# Altium PCB ver3.PcbDoc
Units mil, origin at the board's own origin, x right, y up, seen from the top; angles counter-clockwise.
Board outline 4925 x 3985 mil, 2 copper layers (Top Layer, Bottom Layer); 57 components, 113 nets, 266 pads, 26 vias.
Unrouted connection lines stored in the file: 7.
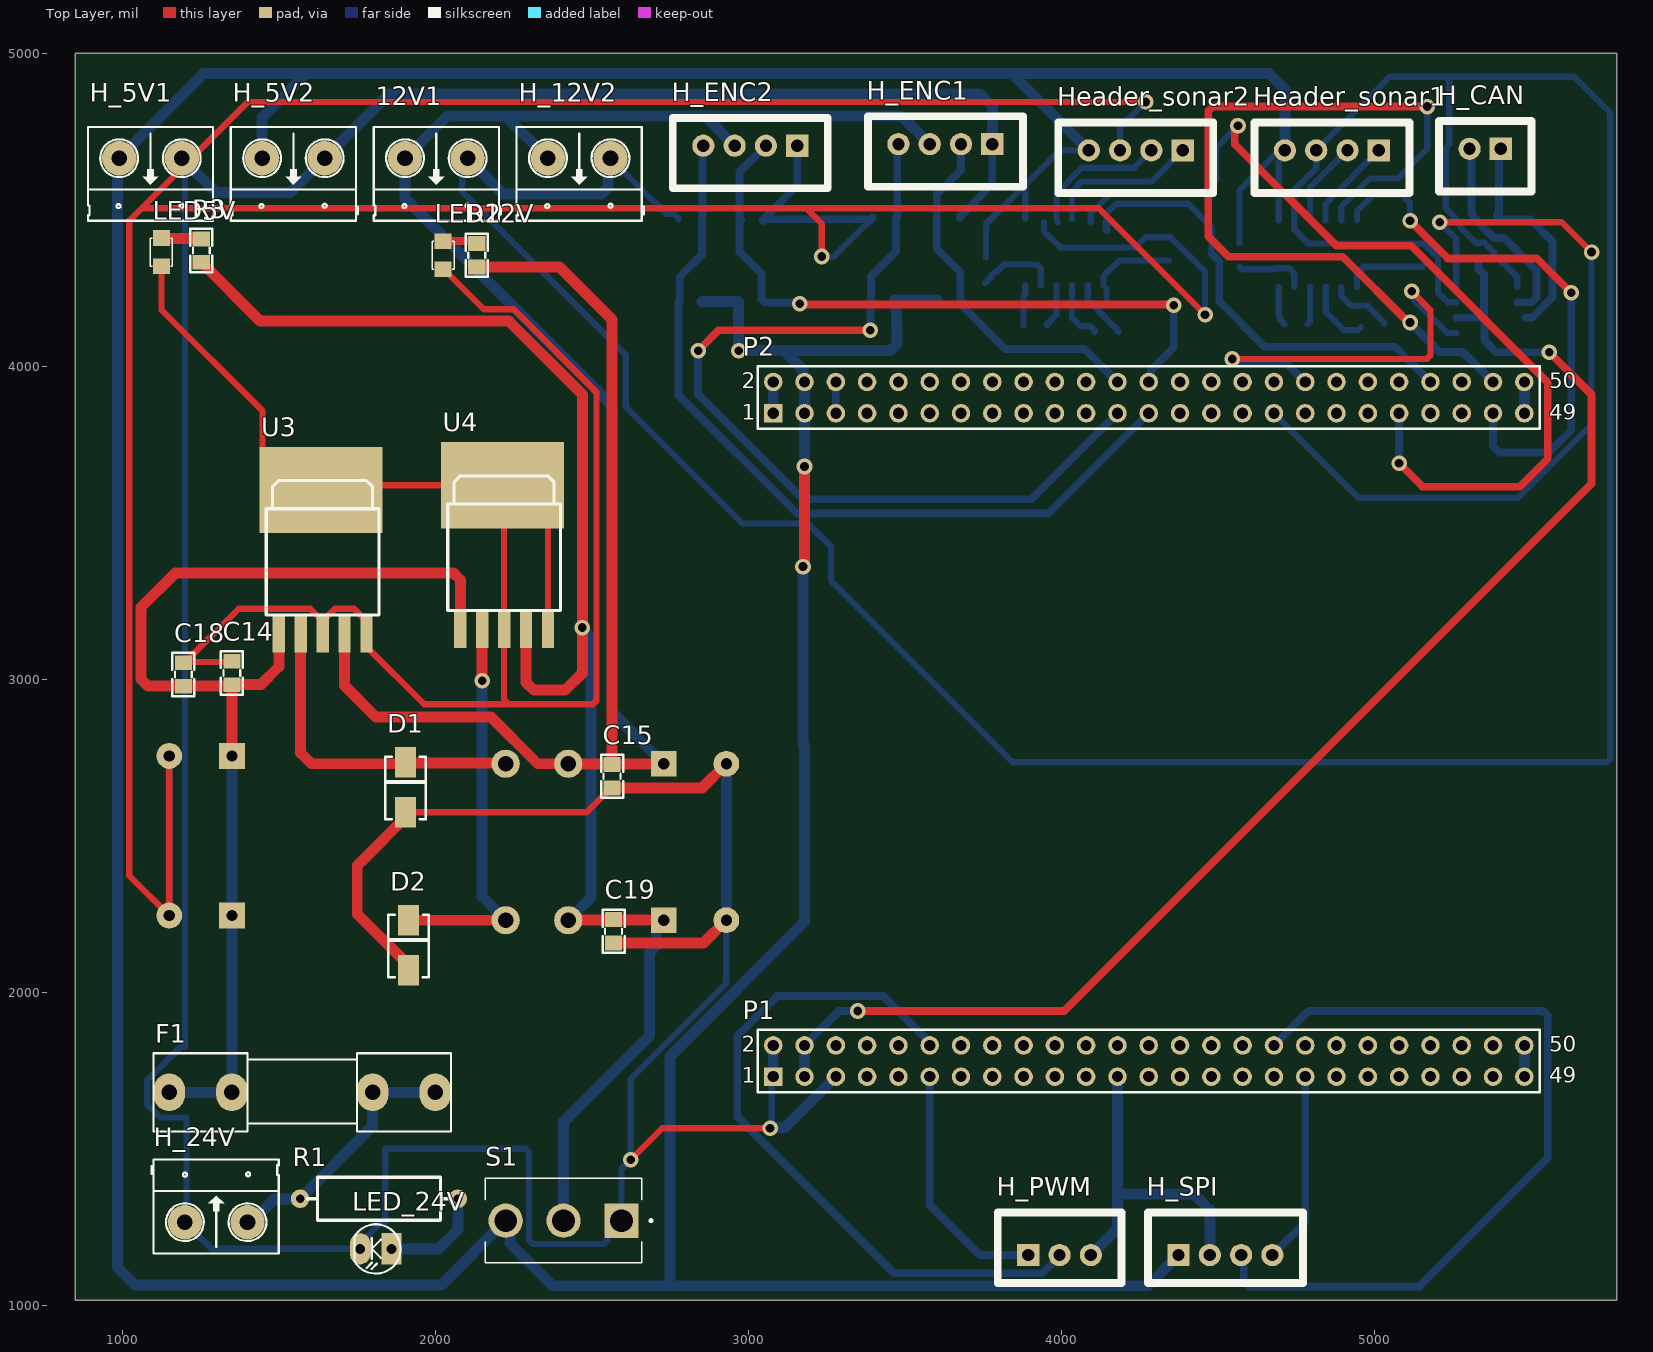
[diagram p0: Top Layer view]
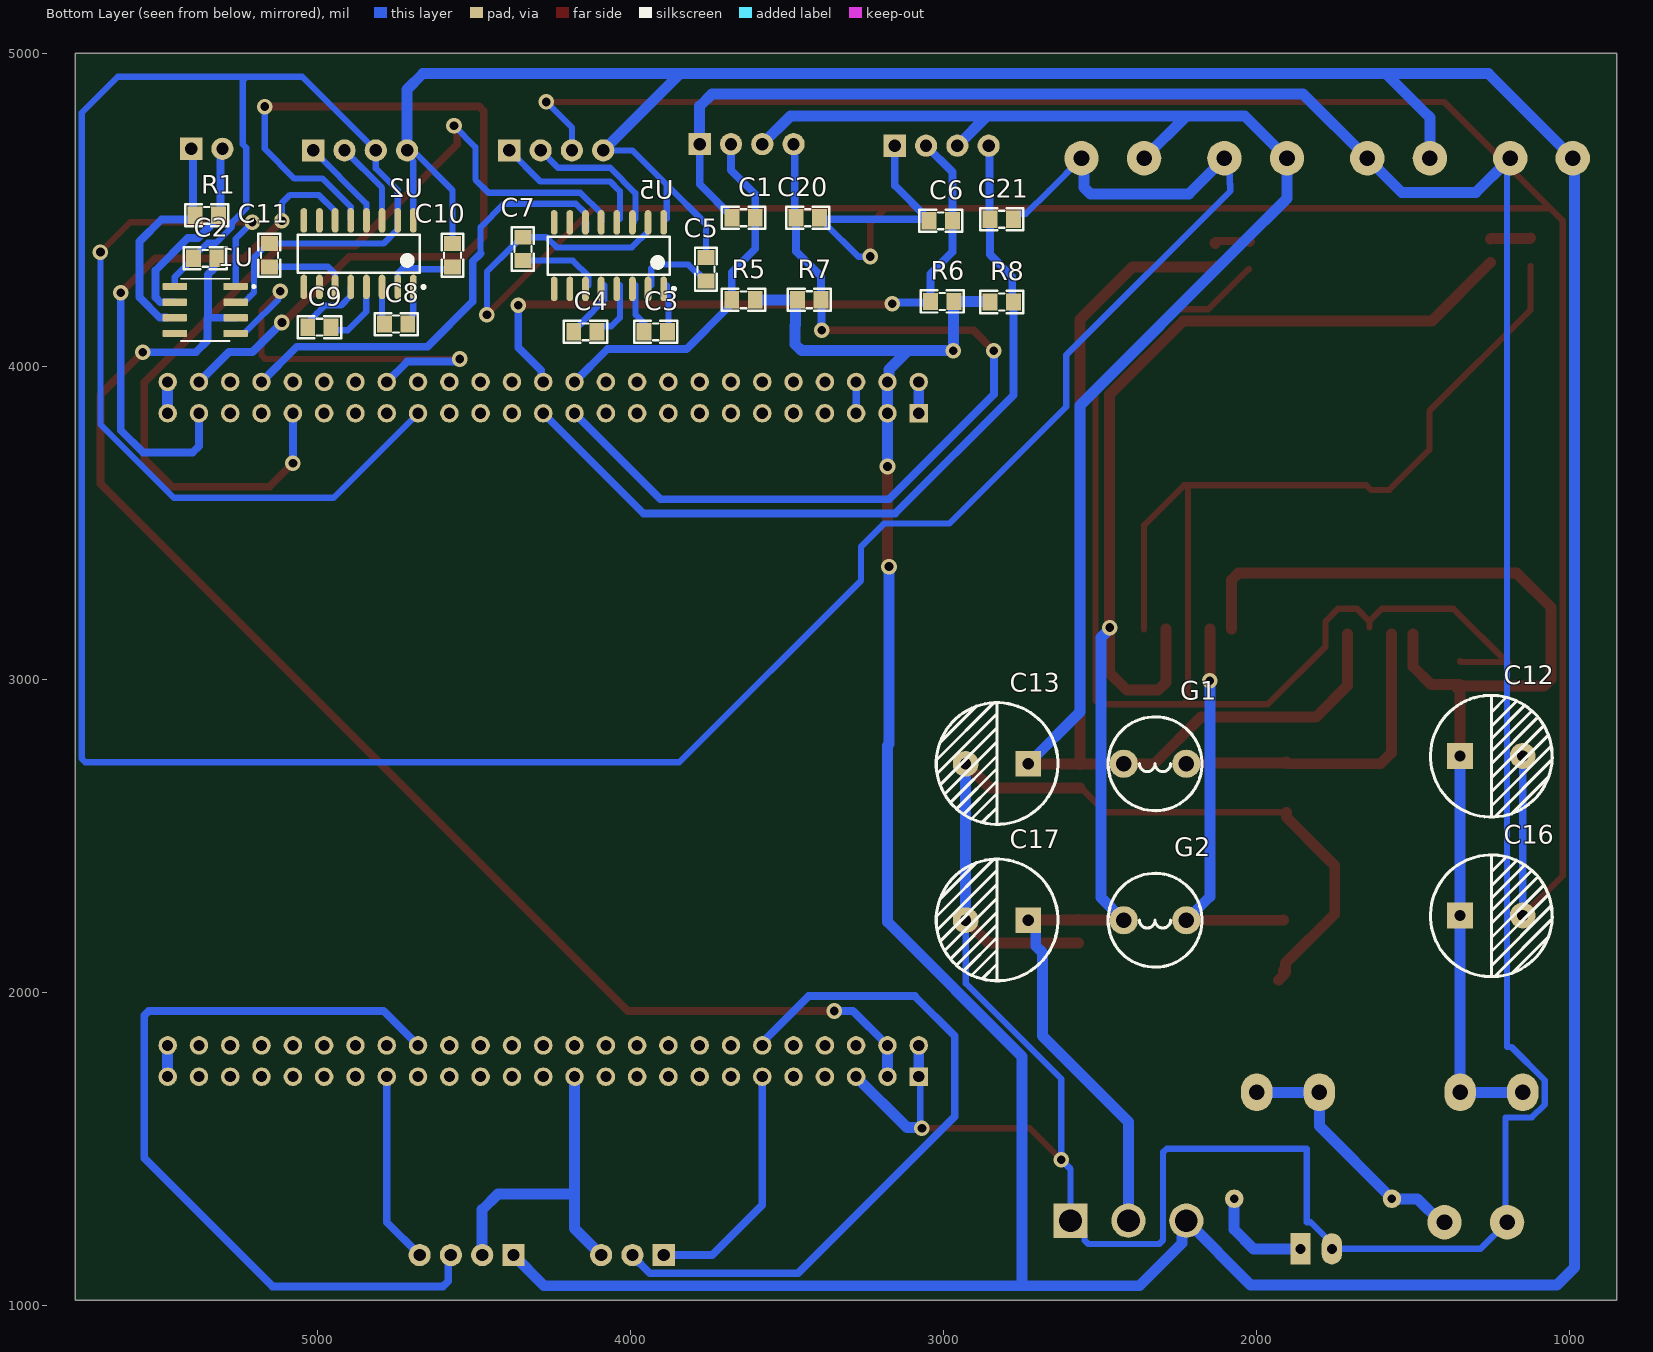
[diagram p1: Bottom Layer view, seen from below]
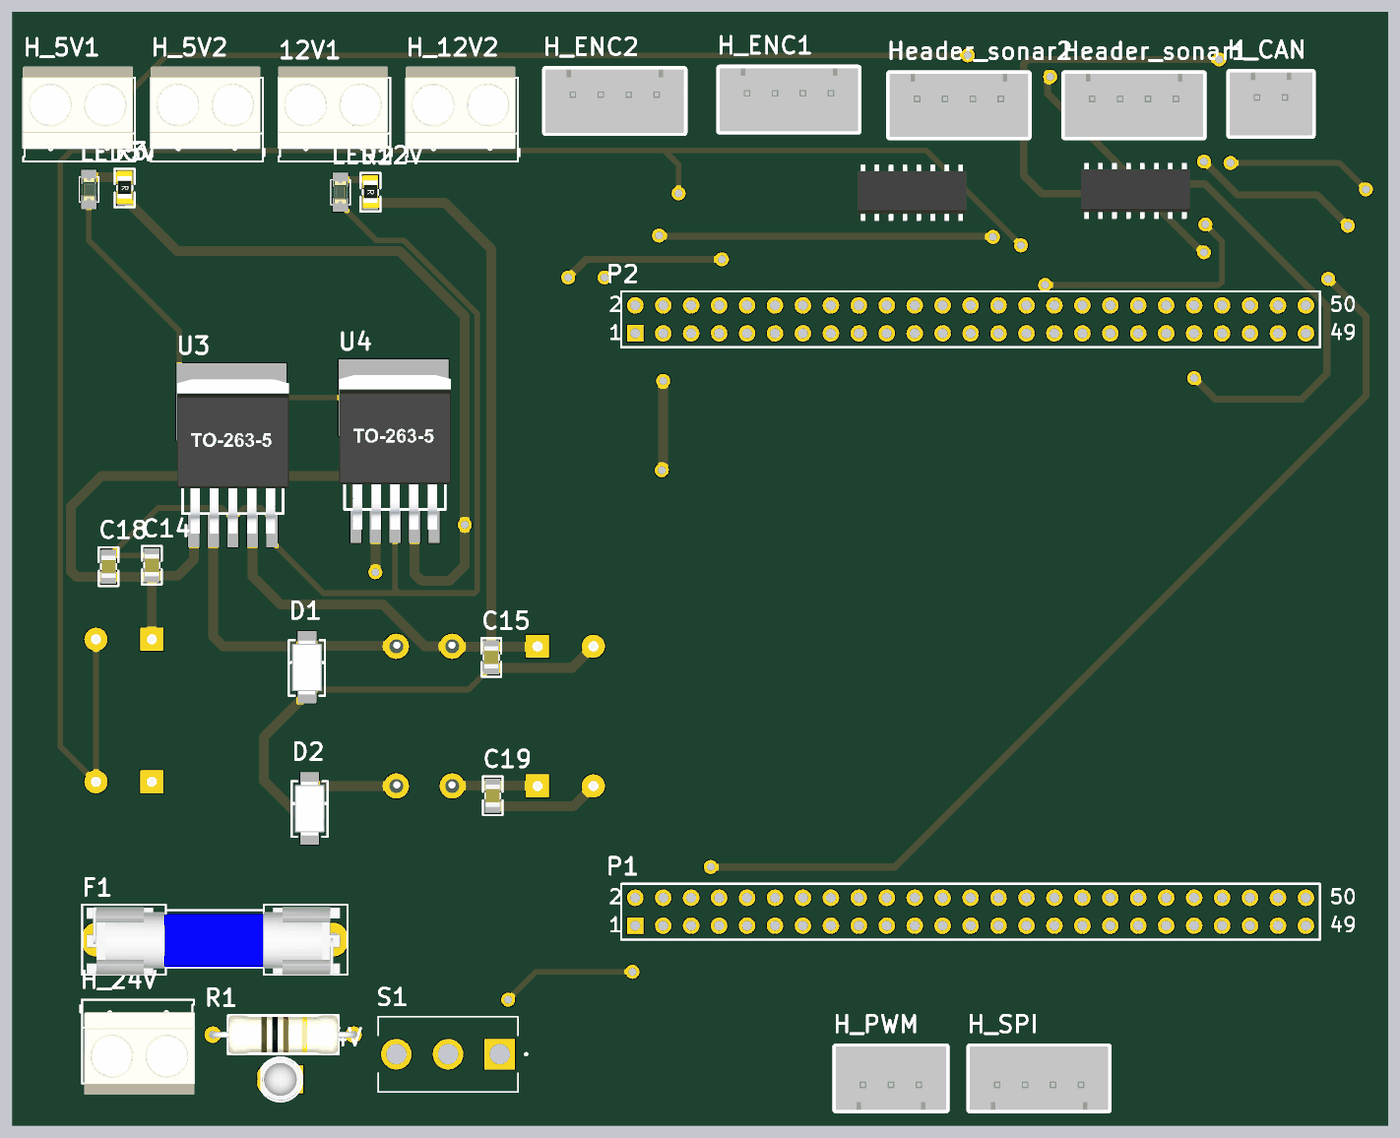
[diagram p2: 3D render of the assembled board from above, using the file's embedded part models]
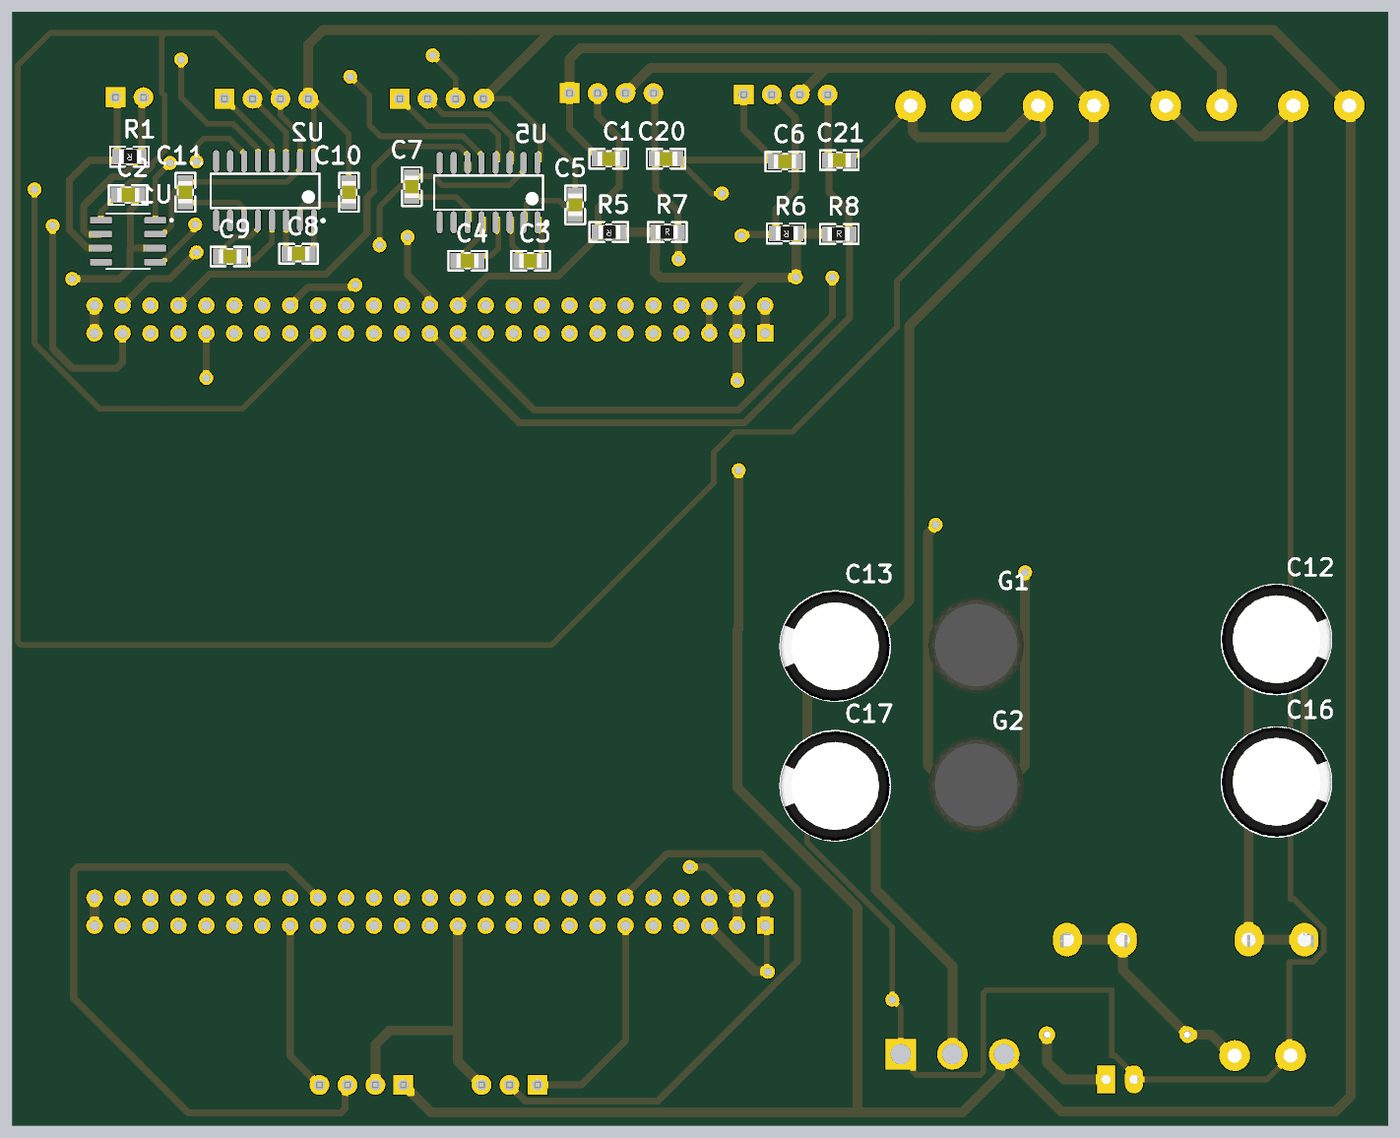
[diagram p3: 3D render of the assembled board from below, using the file's embedded part models]

## Layer stack, top to bottom
Top Solder: solder mask 0.4, Solder Resist, Dk 3.5
Top Layer: signal copper 1.4
Dielectric 1: dielectric 12.6, FR-4, Dk 4.8
Bottom Layer: signal copper 1.4
Bottom Solder: solder mask 0.4, Solder Resist, Dk 3.5

## Board outline
850,1015 5775,1015 5775,5000 850,5000

## Design rules (kind name [scope] priority, off if disabled: settings)
Clearance Clearance_2 [InNamedPolygon('GND_L02_P001')] p1: gap=20 ignorepadtopadclearanceinfootprint=FALSE
Clearance Clearance_1 [InNamedPolygon('GND_L01_P000')] p2: gap=20 ignorepadtopadclearanceinfootprint=FALSE
Clearance [All] p3: gap=10 ignorepadtopadclearanceinfootprint=FALSE
PolygonConnect PolygonConnect_4 [All vs IsNamedPolygon('GND_L02_P001')] p1: connectstyle=Relief reliefconductorwidth=20 reliefentries=4 polygonreliefangle="90 Angle" airgapwidth=20
PolygonConnect PolygonConnect_3 [All vs IsNamedPolygon('GND_L01_P000')] p2: connectstyle=Relief reliefconductorwidth=20 reliefentries=4 polygonreliefangle="90 Angle" airgapwidth=20
PolygonConnect PolygonConnect_2 [All vs IsNamedPolygon('NONET_L02_P002')] p3: connectstyle=Relief reliefconductorwidth=10 reliefentries=4 polygonreliefangle="90 Angle" airgapwidth=10
PolygonConnect PolygonConnect_1 [All vs IsNamedPolygon('NONET_L01_P001')] p4: connectstyle=Relief reliefconductorwidth=10 reliefentries=4 polygonreliefangle="90 Angle" airgapwidth=10
PolygonConnect [All] p5: connectstyle=Relief reliefconductorwidth=10 reliefentries=4 polygonreliefangle="90 Angle" airgapwidth=10
RoutingVias [All] p1: holewidth=28 width=50 viastyle="Through Hole" minholewidth=28 minwidth=50 maxholewidth=28 maxwidth=50
SolderMaskExpansion [All] p1: expansion=4 istentingtop=FALSE
Width [All] p1: maxlimit=35 minlimit=20 preferedwidth=25
30 further rules are at their usual default settings.

## Components (designator, comment, footprint, x,y, rotation, side; value= is the part's Value field where it differs from the comment)
12V1 "Header 2" HED2 2103.33,4665 r180 top
C1 "104" "tu 0805" 3640,4475 r180 bottom
C2 "104" "tu 0805" 5360,4345 r0 bottom
C3 "104" "tu 0805" 3920,4110 r0 bottom
C4 "104" "tu 0805" 4145,4110 r0 bottom
C5 "104" "tu 0805" 3760,4310 r90 bottom
C6 "104" "tu 0805" 3010,4465 r180 bottom
C7 "104" "tu 0805" 4345,4375 r90 bottom
C8 "104" "tu 0805" 4750,4135 r0 bottom
C9 "104" "tu 0805" 4995,4125 r0 bottom
C10 "104" "tu 0805" 4570,4355 r90 bottom
C11 "104" "tu 0805" 5155,4355 r90 bottom
C12 "1000uF" "tu hoa 10mm" 1250,2755 r180 bottom
C13 "1000uF" "tu hoa 10mm" 2830,2730 r0 bottom
C14 "104" "tu 0805" 1350,3020 r90 top
C15 "104" "tu 0805" 2565,2690 r270 top
C16 "1000uF" "tu hoa 10mm" 1250,2245 r180 bottom
C17 "1000uF" "tu hoa 10mm" 2830,2230 r0 bottom
C18 "104" "tu 0805" 1195,3015 r90 top
C19 "104" "tu 0805" 2570,2195 r270 top
C20 "104" "tu 0805" 3435,4475 r180 bottom
C21 "104" "tu 0805" 2815,4470 r180 bottom
D1 "SS34" DIODE_DO214AC_SMA 1905,2655 r90 top
D2 "SS34" DIODE_DO214AC_SMA 1915,2150 r90 top
F1 "F1A" Fuse 1575,1680 r180 top value=Fuse
G1 "100uH 3A" "CUON CAM 100uH3A" 2325,2730 r0 bottom
G2 "100uH 3A" "CUON CAM 100uH3A" 2325,2230 r0 bottom
H_5V1 "Header 2" HED2 1190,4665 r180 top
H_5V2 "Header 2" HED2 1646.67,4665 r180 top
H_12V2 "Header 2" HED2 2560,4665 r180 top
H_24V "Header 2" HED2 1200,1265 r0 top
H_CAN "Header 2P" XH2.54M-2 5405,4695 r180 top
H_ENC1 "Header 4P" XH2.54M-4 3780,4710 r180 top
H_ENC2 "Header 4P" XH2.54M-4 3156.67,4705 r180 top
H_PWM "Header 3P" XH2.54M-3 3895,1160 r0 top
H_SPI "Header 4P" XH2.54M-4 4375,1160 r0 top
Header_sonar1 "Header_sonar1" XH2.54M-4 5015,4690 r180 top
Header_sonar2 "Header_sonar2" XH2.54M-4 4388.33,4690 r180 top
LED5V "LED" LED-0805-Green 1125,4410 r270 top value="LED 3 - 5 ly 2 Colour"
LED12V "LED" LED-0805-Green 2025,4400 r270 top value="LED 3 - 5 ly 2 Colour"
LED_24V "LED 3mm" LED-3MM-WHITE 1860,1180 r180 top
P1 "Header 25X2" HDR2X25 3080,1730 r0 top
P2 "Header 25X2" HDR2X25 3080,3850 r0 top
R1 "1k" "tro vach 1/2w" 1820,1340 r0 top
R1 "1k" "tro smd 0805" 5355,4480 r0 bottom
R2 "1k" "tro smd 0805" 2135,4355 r270 top
R3 "1k" "tro smd 0805" 1255,4370 r270 top
R5 "1k" "tro smd 0805" 3640,4210 r0 bottom
R6 "1k" "tro smd 0805" 3005,4205 r0 bottom
R7 "1k" "tro smd 0805" 3430,4215 r180 bottom
R8 "1k" "tro smd 0805" 2815.1,4208 r180 bottom
S1 "100SP3T1B1M2QE" SW_100SP3T1B1M2QE 2410.04,1270 r180 top
U1 "SN65HVD230" SOIC127P599X175-8N 5360,4180 r0 bottom
U2 "MAX232" SO16 4870,4360 r90 bottom
U3 "LM2576HVS 12.0V SMD" TO263-5 1640,3375 r0 top
U4 "LM2576HVS 5.0V SMD" TO263-5 2220,3390 r0 top
U5 "MAX232" SO16 4070,4353.7 r90 bottom

## Footprints (in the part's own frame and the unit in brackets; to place one, negate y for a bottom-side part, rotate by r counter-clockwise, add the part's x,y. Pads: shape width x height; smd on the part's side, far side on the other; paste and mask are expansions set on the pad)
"CUON CAM 100uH3A" [mil] "100uH3A"
  round 90 hole 50: 1(-100,0) 2(100,0)
  silkscreen extent -150,-150 150,150, body extent -171,-175 171,167, height 394
DIODE_DO214AC_SMA [mm] "Diode 2214AC- SMA type"
  rect 2.5x1.7 smd: 1(-2.032,0) 2(2.032,0)
  silkscreen extent -2.59,-1.63 2.46,1.7, body extent -2.53,-1.35 2.47,1.35, height 2.25
Fuse [mil] "De Fuse"
  oval 100x120 hole 50: 1(-425,0) 1(-225,0) 2(225,0) 2(425,0)
  silkscreen extent -475,-125 475,125, body extent -448,-117 459,127, height 378
HDR2X25 [mm] "Connector; Header; 25x2 Position"
  rect 1.5x1.5 hole 0.9: 1(0,0)
  round 1.5 hole 0.9: 2(0,2.54) 3(2.54,0) 4(2.54,2.54) 5(5.08,0) 6(5.08,2.54) 7(7.62,0) 8(7.62,2.54) 9(10.16,0) 10(10.16,2.54) 11(12.7,0) 12(12.7,2.54) 13(15.24,0) 14(15.24,2.54) 15(17.78,0) 16(17.78,2.54) 17(20.32,0) 18(20.32,2.54) 19(22.86,0) 20(22.86,2.54) 21(25.4,0) 22(25.4,2.54) 23(27.94,0) 24(27.94,2.54) 25(30.48,0) 26(30.48,2.54) 27(33.02,0) 28(33.02,2.54) 29(35.56,0) 30(35.56,2.54) 31(38.1,0) 32(38.1,2.54) 33(40.64,0) 34(40.64,2.54) 35(43.18,0) 36(43.18,2.54) 37(45.72,0) 38(45.72,2.54) 39(48.26,0) 40(48.26,2.54) 41(50.8,0) 42(50.8,2.54) 43(53.34,0) 44(53.34,2.54) 45(55.88,0) 46(55.88,2.54) 47(58.42,0) 48(58.42,2.54) 49(60.96,0) 50(60.96,2.54)
  silkscreen extent -1.27,-1.27 62.23,3.81
HED2 [mil] "Header 2, 2 pin, hight 300mil, Pin to Pin 200, Colour Green"
  round 110 hole 50: 1(0,0) 2(200,0)
  silkscreen extent -106,-100 300,200, body extent -92,-140 302,155, height 394
LED-3MM-WHITE [mil] "LED 2 PIN, 3ly Only colour"
  rect 65x100 hole 32: 1(0,0)
  oval 65x100 hole 32: 2(100,0)
  silkscreen extent -29,-78 118,79, body extent -25,-75 113,75, height 217
LED-0805-Green [mil]
  rect 50x55 smd: 1(0,0) 2(90,0)
  silkscreen extent 0,-35 90,35, body extent 5,-25 85,25, height 43
SO16 [mm] "SOIC, 16-Leads, Body 9.90x3.91mm, Pitch 1.27mm, IPC Medium Density"
  oval 2x0.55 smd: 1(-2.7,-4.445) 2(-2.7,-3.175) 3(-2.7,-1.905) 4(-2.7,-0.635) 5(-2.7,0.635) 6(-2.7,1.905) 7(-2.7,3.175) 8(-2.7,4.445) 9(2.7,4.445) 10(2.7,3.175) 11(2.7,1.905) 12(2.7,0.635) 13(2.7,-0.635) 14(2.7,-1.905) 15(2.7,-3.175) 16(2.7,-4.445)
  silkscreen extent -2.82,-5.39 1.55,4.95, body extent -3,-4.95 3,4.95
SOIC127P599X175-8N [mm]
  rrect25% 1.97x0.6 smd: 1(-2.47,-1.905) 2(-2.47,-0.635) 3(-2.47,0.635) 4(-2.47,1.905) 5(2.47,1.905) 6(2.47,0.635) 7(2.47,-0.635) 8(2.47,-1.905)
  silkscreen extent -4.05,-2.52 1.99,2.52
SW_100SP3T1B1M2QE [mm]
  rect 2.775x2.775 / inner round 2.775 / far side rect 2.775x2.775 hole 1.85: 1(-4.7,0)
  round 2.775 hole 1.85: 2(0,0) 3(4.7,0)
  silkscreen extent -7.2,-3.43 6.35,3.43
TO263-5 [mil] "TO263-5"
  rect 39.37x120 smd: 1(-140,-230) 2(-70,-230) 3(0,-230) 4(70,-230) 5(140,-230)
  rect 393.7x275.59 smd: 6(-5,230)
  silkscreen extent -180,-170 180,260, body extent -200,-242 200,310, height 180
"tro smd 0805" [mm]
  rect 1.2x1.4 smd: 1(-0.946,-0.061) 2(0.954,-0.061)
  silkscreen extent -1.75,-0.97 1.75,0.84, body extent -1.56,-0.76 1.44,0.64, height 0.53
"tro vach 1/2w" [mm]
  round 1.5 hole 0.7: 1(-6.4,0) 2(6.4,0)
  silkscreen extent -5.84,-1.75 5.84,1.75, body extent -6.62,-1.75 6.62,1.75, height 3.5
"tu 0805" [mm] "Compoment SMD 80x50mil"
  rect 1.2x1.4 smd: 1(-0.946,-0.003) 2(0.954,-0.003)
  silkscreen extent -1.75,-0.89 1.75,0.89, body extent -1.01,-0.64 1.01,0.63, height 0.61
"tu hoa 10mm" [mm]
  rect 2.1x2.1 hole 0.9: 1(-2.54,0)
  round 2.1 hole 0.9: 2(2.54,0)
  silkscreen extent -4.95,-4.96 4.93,4.92, body extent -5,-5 5.01,5, height 20.01
XH2.54M-2 [mm]
  rect 1.8x1.8 hole 1: 1(0,0)
  round 1.8 hole 1: 2(2.54,0)
  silkscreen extent -2.48,-2.26 5.02,3.46, body extent -2.48,-2.26 5.02,3.48, height 6.91
XH2.54M-3 [mm]
  rect 1.8x1.8 hole 1: 1(0,0)
  round 1.8 hole 1: 2(2.54,0) 3(5.08,0)
  silkscreen extent -2.48,-2.26 7.56,3.46, body extent -2.48,-2.26 7.56,3.48, height 6.91
XH2.54M-4 [mm]
  rect 1.8x1.8 hole 1: 1(0,0)
  round 1.8 hole 1: 2(2.54,0) 3(5.08,0) 4(7.62,0)
  silkscreen extent -2.48,-2.26 10.1,3.46, body extent -2.48,-2.26 10.1,3.48, height 6.91

## Part data
12V1 H_5V1 H_5V2 H_12V2 H_24V: "Header, 2-Pin", Manufacturer="Generic Components", Class=Connector
C1 C3 C4 C5 C6 C7 C8 C9 C10 C11 C20 C21: library part "Tu 0805 105 50V 10%", "Dán", Chung_Loai=Dán, Don_Vi=Con, Ma_Hang=MH004552, So_Chan=2, Ten_Linh_Kien="Tụ 0805 105-1uF 10% 50V"
C2 C14 C15 C18 C19: library part "Tu 0805 104 50V 10%", "Dán", Chung_Loai=Dán, Don_Vi=Con, Ma_Hang=MH004551, So_Chan=2, Ten_Linh_Kien="Tụ 0805 104-100nF 10% 50V"
C12 C13 C16 C17: library part "Tu Hoa 1000uF 10V 10x12", "Cắm", Chung_Loai=Cắm, Don_Vi=Con, Ma_Hang=MH006614, So_Chan=2, Ten_Linh_Kien="Tụ Hóa 1000uF 10V 10x12MM"
D1 D2: "DIODE SCHOTTKY 40V 3A SMA", MPN=SS34, Solder=SMT
F1: library part Fuse, "Fuse", Designed by=VanDungEvn
G1 G2: library part "CUON CAM 100uH DIP", "Dán", Chung_Loai=Dán, Don_Vi=Con, Ma_Hang=MH002209, Ten_Linh_Kien="Cuộn Cảm 100uH 3A 8x10MM"
H_CAN H_ENC1 H_ENC2 H_PWM H_SPI: "THT", Chung_Loai=Cắm, Don_Vi=Con
  H_CAN: Ma_Hang=MH002852, Ten_Linh_Kien="Header 2P XH2.54-2P Đực Cong"
  H_ENC1 H_ENC2 H_SPI: Ma_Hang=MH001310, Ten_Linh_Kien="Header 4P XH2.54-4P Đực Cong"
  H_PWM: Ma_Hang=MH001302, Ten_Linh_Kien="Header 3P XH2.54-3P Đực Cong"
Header_sonar1 Header_sonar2: library part "Header 4P", "THT", Chung_Loai=Cắm, Don_Vi=Con, Ma_Hang=MH001310, Ten_Linh_Kien="Header 4P XH2.54-4P Đực Cong"
LED5V LED12V: library part "LED SMD"
LED_24V: library part "LED 3mm Trang", "Cắm", Chung_Loai=Cắm, Don_Vi=Con, Ma_Hang=MH009001, Ten_Linh_Kien="LED 3MM Trắng SS (1000c)"
P1 P2: "Header, 25-Pin, Dual row", LatestRevisionDate=17-Jul-2002, LatestRevisionNote="Re-released for DXP Platform.", Publisher="Altium Limited"
R1: library part "Tro Vach 1/2W 5% 220k", "Cắm", Chung_Loai=Cắm, Don_Vi=Con, Ma_Hang=MH006190, So_Chan=2, Ten_Linh_Kien="Trở 5% 1/2w 220k"
R1 R2 R3 R5 R6 R7 R8: library part "Tro 0805 1% 470k", "Dán", Chung_Loai=Dán, Don_Vi=Con, Ma_Hang=MH005485, So_Chan=2, Ten_Linh_Kien="Trở 0805 1% 470k"
S1: Package=None, Availability=Unavailable, MF="{'manufacturer': u'E-Switch'}", MP=100SP3T1B1M2QE, Price=None
U1: "1/1 Transceiver Half CANbus 8-SOIC", Package="SOIC-8 Texas Instruments", Availability=Unavailable, MF="Texas Instruments", MP=SN65HVD230, Price=None, SnapEDA_Link=https://www.snapeda.com/parts/SN65HVD230/Texas%20Instruments/view-part/558072/?ref=snap
U2 U5: "RS232 LEVEL SHIFTER", Manufacturer="Texas Instruments", Manufacturer Part Number=MAX232DR, Package / Case="16-SOIC (3.9mm Width)", Supplier Part Number=296-14619-1-ND, Voltage - Supply="4.5 V ~ 5.5 V", Category="Integrated Circuits (ICs)", Number of Drivers/Receivers=2/2, Packaging="Cut Tape (CT)", Protocol=RS232, RoHS="RoHS Compliant", Supplier=Digi-Key, Supplier 1=Digi-Key, Supplier Part Number 1=296-14619-1-ND, Type=Transceiver
U3: library part "LM2576HVS 5.0V SMD", "Dán", Chung_Loai=Dán, Don_Vi=Con, Ma_Hang=MH002362, Ten_Linh_Kien="LM2576HVS-5.0V BUCK 5V 3A TO263-5"
U4: "Dán", Chung_Loai=Dán, Don_Vi=Con, Ma_Hang=MH002362, Ten_Linh_Kien="LM2576HVS-5.0V BUCK 5V 3A TO263-5"

## Via types
v1: diameter 50, hole 28, Top Layer to Bottom Layer, 26 vias

## Nets (pads, with @x,y where several pads share a name; then routed paths per layer and width w, separated by ;. In a path a pad name is that pad's centre, name@x,y a point inside that pad or via, vN(x,y) a via of type N, cw(c..) or ccw(c..) an arc to the next point about the centre after c; other vN are vias at no path point)
3.3V: P2.5 P2.6 | length 100
  Bottom Layer w25: P2.5 P2.6
5V: C5.2 C10.2 H_5V1.2 H_5V2.2 H_SPI.1 Header_sonar1.4 Header_sonar2.4 P2.3 P2.4 R5.1 R6.1 R7.1 R8.1 S1.3 U2.16 U5.16 | length 17428.5
  Top Layer w35: v1(3175,3360) 3177.87,3362.87 3177.87,3373.48 3180,3375.61 v1(3180,3680)
  Bottom Layer w20: C5.2 3759.87,4454.87 3885,4580 ; U5.16@3885,4471.3 3885,4580 ; Header_sonar2.4 3995,4690 3885,4580 ; C10.2 4569.87,4563.04 4687.09,4680.27 Header_sonar1.4@4705.27,4680.27 ; U2.16 4695,4656.24 Header_sonar1.4@4712.15,4673.39 ; Header_sonar1.4@4708.12,4683.12 Header_sonar1.4 Header_sonar1.4@4715,4680.27
  Bottom Layer w35: H_5V2.2 1446.67,4794.5 1467.17,4815 1587.17,4935 ; R8.1 2853.22,4206.5 2966.88,4206.5 R6.1 2968.89,4206.28 2968.89,4051.11 v1(2970,4050) 3115,4050 ; v1(3175,3360) 3175,2792.97 3180,2787.97 3180,2225 2750,1795 2750,1062.07 ; v1(3180,3680) P2.3 P2.4 3175.4,3954.6 3175.4,3989.6 3115,4050 ; R7.1 R7.1@3467.33,4212.5 ; R5.1 3602.67,4212.5 R7.1@3467.33,4212.5 ; Header_sonar2.4 3843.33,4935 ; H_SPI.1 4277.07,1062.07 2750,1062.07 ; Header_sonar1.4 4715,4885 4665,4935 3843.33,4935 ; 1587.17,4935 3843.33,4935 ; 1587.17,4935 1260,4935 H_5V1.2 985,4660 985,1120 1040,1065 2020,1065 S1.3 2239.21,1255.79 2239.21,1197.76 2374.9,1062.07 2750,1062.07 ; 3115,4050 3454.5,4050 3475,4070.5 3475,4130.9 3473.35,4132.55 3473.35,4206.48 R7.1@3467.33,4212.5
5V.1: C17.1 C19.1 G2.2 R3.2 S1.2 U4.4 | length 5051.9
  Top Layer w35: R3.2 1440.03,4145 2235,4145 2470,3910 v1(2470,3165) 2470,3020 2415,2965 2315,2965 2290,2990 U4.4 ; G2.2 2426.11,2231.11 2568.75,2231.11 C19.1 2570.98,2231.11 2728.89,2231.11 C17.1
  Bottom Layer w35: S1.2 2410.04,1585.04 2685,1860 2685,2127.07 2706.16,2148.23 2706.16,2206.16 C17.1 ; G2.2@2417.52,2222.52 G2.2 2497.5,2302.5 2497.5,3133.44 2470,3160.94 v1(2470,3165)
12V: 12V1.2 C13.1 C15.1 G1.2 H_12V2.2 H_ENC1.3 H_ENC2.3 R2.2 U3.4 | length 7593.5
  Top Layer w35: U3.4 1710,2980 1810,2880 2177.53,2880 2327.5,2730.03 G1.2 ; R2.2@2130.03,4320 R2.2 2397.57,4317.43 2564.87,4150.13 C15.1 ; G1.2 2426.39,2728.61 2563.48,2728.61 C15.1 ; C13.1@2731.39,2731.39 C13.1 2728.61,2728.61 2566.25,2728.61 C15.1
  Bottom Layer w35: H_12V2.2 2225,4800 ; C13.1 2565,2895 2565,3875 2050,4390 1903.33,4536.67 12V1.2 2038.33,4800 2225,4800 ; H_ENC2.3 2861.67,4800 ; H_ENC1.3 3490,4800 2861.67,4800 ; 2225,4800 2861.67,4800
24V: F1.1 H_24V.2 R1.1@1568.03,1340 | length 835.2
  Bottom Layer w35: H_24V.2 1411.23,1265 1486,1339.77 1567.8,1339.77 1568.03,1340 1800,1571.97 1800,1680 F1.1@2000,1680
BOOT0: P2.21
GND: 12V1.1 C1.1 C2.2 C6.1 C7.2 C11.2 C12.2 C13.2 C14.2 C15.2 C16.2 C17.2 C18.2 C19.2 C20.2 C21.2 D1.1 D2.1 H_5V1.1 H_5V2.1 H_12V2.1 H_24V.1 H_ENC1.1 H_ENC2.1 H_PWM.3 H_SPI.2 Header_sonar1.3 Header_sonar2.3 LED5V.2 LED12V.2 LED_24V.2 P1.1 P1.2 P1.5 P1.23 P1.49 P1.50 P2.1 P2.2 P2.49 P2.50 S1.1 U1.2 U1.8 U2.15 U3.3 U3.5 U3.6 U4.3 U4.5 U4.6 U5.15 | length 43874.6
  Top Layer w20: LED5V.2 1125,4180.47 1448.15,3857.32 1448.15,3732.8 1575.94,3605 U3.6 1650,3620 U4.6 ; C12.2 C16.2 1022.5,2372.5 1022.5,4465.78 1061.72,4505 ; C14.2 1347.63,3055.07 C18.2@1201.57,3055.07 ; U3.3@1640,3165.16 U3.3@1640,3185.31 ; D1.1 2483.49,2574.98 2560.93,2652.43 C15.2 ; LED12V.2 2027.5,4310 2155,4182.5 2250.53,4182.5 2515,3918.03 2515,2931.72 2503.28,2920 2235,2920 ; U4.5 2360,3492.2 2232.2,3620 U4.6 ; v1(2625,1465) 2725,1565 v1(3070,1565) ; v1(3235,4350.81) 3235,4455 3185,4505 ; v1(4270,4845) 1401.72,4845 1061.72,4505 ; v1(4460,4165) 4120,4505 3185,4505 ; 1061.72,4505 3185,4505 ; C18.2@1201.57,3055.07 1197.63,3055.07 C18.2 1199.07,3052.57 C18.2@1201.57,3055.07 ; C18.2@1201.57,3055.07 1371.5,3225 1600.31,3225 U3.3@1640,3185.31 ; U3.3@1640,3185.31 1679.69,3225 1740.31,3225 1780,3185.31 U3.5 1780,3104.69 1964.69,2920 2235,2920 ; U4.6 2220,3615 U4.3 2220,2935 2235,2920
  Top Layer w35: D1.1 1905,2559.24 1775,2429.24 1775,2428.54 1750.73,2404.27 1750.73,2250 1907.51,2093.22 1907.51,2062.49 D2.1 1915,2054.24 D2.1@1930.96,2038.27 ; C15.2 2852.43,2652.43 C13.2 ; C19.2 2857.43,2157.43 C17.2
  Bottom Layer w20: H_5V1.1 1200,4665 1200,4655 1200,1825 1186.01,1825 1080,1718.99 1080,1641.01 1121.01,1600 1205,1600 1205,1270 H_24V.1 1285,1180 LED_24V.2 1760,1197.5 1827.5,1265 1840,1265 1840,1500 2287.91,1500 2299.63,1488.28 2299.63,1207.09 2311.34,1195.37 2538.74,1195.37 2550.45,1207.09 2550.45,1225.37 S1.1 2595.08,1435.08 v1(2625,1465) 2625,1723.03 2930,2028.03 C17.2 ; 12V1.1 2086.11,4647.78 2086.11,4583.43 2085,4582.31 2085,4560 2608.75,4036.25 2608.75,3871.25 2982.5,3497.5 3191.14,3497.5 3264.32,3424.32 3264.32,3315.68 3845,2735 5743.28,2735 5755,2746.72 5755,4810 5640,4925 5228.28,4925 ; H_12V2.1 2663.49,4561.51 2737.57,4487.43 2763.8,4487.43 2777.43,4473.8 C21.2 ; v1@3072.87,1567.87 3075,1570 3075,1725 P1.1 ; v1(3235,4350.81) 3235,4350 3272.56,4350 3379.87,4457.31 3383.8,4457.31 3397.43,4470.93 C20.2 ; U5.15 3945,4431.46 3996.46,4380 4237.14,4380 4269.71,4412.57 C7.2 4348.8,4412.57 4377.56,4383.82 4378.28,4383.82 4460,4302.1 v1(4460,4165) ; Header_sonar2.3 4188.33,4763.33 v1(4270,4845) ; U1.2 5235.79,4205 5218.3,4222.49 5218.12,4222.49 5203.98,4236.63 5203.98,4348.13 5190.71,4361.39 5189.98,4361.39 5158.8,4392.57 C11.2 4790.18,4392.57 4745,4437.76 U2.15 4745,4562.43 4815,4632.43 Header_sonar1.3 5050,4925 5228.28,4925 ; U1.8 5457.24,4285.46 5415.13,4327.57 5411.2,4327.57 5383.95,4354.82 5383.95,4363.42 5352.11,4395.26 5325.44,4395.26 5274.15,4446.55 5274.15,4459.49 5228.64,4505 5228.64,4698.64 5240,4710 5240,4913.28 5228.28,4925
  Bottom Layer w25: C16.2 C12.2 ; H_ENC2.1 3156.67,4578.24 3047.23,4468.8 C6.1 3052.23,4469.87 3392.43,4469.87 C20.2 ; C1.1 3677.23,4478.8 3780,4581.57 H_ENC1.1
  Bottom Layer w35: H_5V1.1@1200,4655 1300,4555 1536.67,4555 H_5V2.1 1851.67,4870 3741.16,4870 3780,4831.16 H_ENC1.1 ; 12V1.1 2217.17,4551.16 2531.16,4551.16 2551.67,4571.67 2551.67,4656.67 H_12V2.1 ; C17.2 C13.2 ; v1(3070,1565) 3072.87,1567.87 3117.87,1567.87 P1.5 ; P1.1 P1.2 ; P2.1 P2.2 ; H_PWM.3 4180,1245 4180,1355 ; P1.23 4180,1355 ; H_SPI.2 4475,1305 4425,1355 4180,1355 ; P1.49 P1.50 ; P2.49 P2.50
NetC3_1: C3.1 U5.1 | length 130.6
  Bottom Layer w20: C3.1@3880,4130.13 3880,4224.71 3885,4229.71 U5.1@3885,4258.7
NetC3_2: C3.2 U5.3 | length 141.1
  Bottom Layer w20: C3.2@3954.8,4130.13 3954.8,4134.07 3985,4164.27 U5.3@3985,4258.7
NetC4_1: C4.1 U5.4 | length 197.4
  Bottom Layer w20: U5.4@4035,4258.7 4035,4155 4062.31,4127.69 4094.15,4127.69 4107.77,4114.07 C4.1
NetC4_2: C4.2 U5.5 | length 189.9
  Bottom Layer w20: U5.5@4085,4258.7 4085,4212.37 4151.39,4145.98 4151.39,4143.61 4167.31,4127.69 4168.95,4127.69 4182.57,4114.07 C4.2
NetC5_1: C5.1 U5.2 | length 263.6
  Bottom Layer w20: C5.1@3757.31,4266.27 3777.43,4286.39 3777.43,4290.33 3791.05,4303.95 3795.71,4303.95 3816.76,4325 3922.97,4325 3934.68,4313.28 3934.68,4259.02 U5.2@3935,4258.7
NetC7_1: C7.1 U5.6 | length 288.3
  Bottom Layer w20: U5.6@4135,4258.7 4135,4287.24 4185.53,4337.77 C7.1 ; U5.6@4145,4218.41 U5.6
NetC8_1: C8.1 U2.1 | length 125.9
  Bottom Layer w20: U2.1 4695,4164.41 4699.15,4160.26 4699.15,4148.76 C8.1
NetC8_2: C8.2 U2.3 | length 121.6
  Bottom Layer w20: C8.2 4795,4142.56 U2.3
NetC9_1: C9.1 U2.4 | length 220.5
  Bottom Layer w20: U2.4 4845.32,4253.38 4845.32,4223.67 4845.54,4223.45 4845.54,4174.46 4905,4115 4947.64,4115 C9.1
NetC9_2: C9.2 U2.5 | length 206.1
  Bottom Layer w20: U2.5 4895,4225.16 4925.83,4194.33 4978.04,4194.33 5003.82,4168.55 5003.82,4167.83 5032.57,4139.07 C9.2@5032.57,4135.13
NetC10_1: C10.1 U2.2 | length 229.8
  Bottom Layer w20: C10.1 4577.64,4310 4679.16,4310 4682.23,4313.07 4729.39,4313.07 4744.68,4297.77 4744.68,4254.02 U2.2
NetC11_1: C11.1 U2.6 | length 260.6
  Bottom Layer w20: U2.6 4945.32,4254.02 4945.32,4295.32 4967.77,4317.77 C11.1
NetC12_1: C12.1 C14.1 C16.1 C18.1 F1.2 U3.1 U4.1 | length 3551.5
  Top Layer w35: C16.1 C16.1@1351.39,2243.61 ; C12.1 1350,2962.52 1360.19,2972.71 1355.13,2977.77 C18.1 1082.23,2977.77 1060,3000 1060,3230 1170,3340 2057.82,3340 2080,3317.82 U4.1 ; C14.1 1442.77,2982.77 1500,3040 U3.1
  Bottom Layer w35: F1.2@1150,1680 1350,1680 C16.1 C12.1
NetD1_2: D1.2 G1.1 U3.2 | length 1071.5
  Top Layer w35: U3.2 1570,2765 1605,2730 1905,2730 D1.2 1907.51,2732.51 2222.49,2732.51 G1.1 G1.1@2225,2715.12
NetD2_2: D2.2 G2.1 U4.2 | length 1271.1
  Top Layer w35: D2.2 G2.1 ; v1(2150,2995) U4.2
  Bottom Layer w35: v1(2150,2995) 2150,2305 G2.1
NetH_CAN_1: H_CAN.1 R1.2@5392.57,4482.39 U1.6 | length 720
  Bottom Layer w25: R1.2@5392.57,4478.46 5401.45,4469.58 5499.49,4469.58 5570,4399.07 5570,4220.5 5505.19,4155.69 U1.6@5483.52,4155.69 ; R1.2@5392.57,4482.39 5398.79,4488.61 5398.79,4688.79 H_CAN.1
NetH_CAN_2: H_CAN.2 R1.1@5317.77,4482.39 U1.7 | length 650.9
  Bottom Layer w25: H_CAN.2 5311.39,4688.61 5311.39,4488.78 5318.02,4482.14 5318.02,4478.21 5346.45,4449.78 5346.45,4445.51 5364.21,4427.76 5365.58,4427.76 5383.33,4410 5415.71,4410 5518.52,4307.19 5518.52,4219.64 5503.88,4205 U1.7
NetLED5V_1: LED5V.1 R3.1 | length 128.8
  Top Layer w35: LED5V.1 1126.39,4408.61 1251.22,4408.61 R3.1
NetLED12V_1: LED12V.1 R2.1 | length 119.3
  Top Layer w25: LED12V.1 2132.61,4400 R2.1
  Top Layer w35: LED12V.1@2023.61,4398.61 LED12V.1 ; R2.1 R2.1@2133.99,4393.61
NetLED_24V_1: LED_24V.1 R1.2@2071.97,1340 | length 335.7
  Bottom Layer w35: LED_24V.1 2010,1180 2071.97,1241.97 R1.2@2071.97,1340
NRST: P1.6
PA0: H_PWM.2 P1.12 | length 2259.1
  Bottom Layer w25: P1.12 3580,1839.22 3562.97,1856.24 3562.97,1857.03 3432.5,1987.5 3092.5,1987.5 2965,1860 2965,1602.82 3465.76,1102.07 3939.75,1102.07 3995,1157.31 H_PWM.2
PA1: H_PWM.1 P1.11 | length 791.3
  Bottom Layer w25: P1.11 3580,1320 3740,1160 H_PWM.1
PA2: P1.14
PA3: P1.13
PA4: P1.16
PA5: P1.15
PA6: P1.18
PA7: P1.17
PA8: P2.43
PA9: P2.44 U5.11 | length 1453.5
  Bottom Layer w20: U5.11 4145,4488.54 4175.83,4519.37 4405.63,4519.37 4480.22,4444.78 4480.22,4360.22
  Bottom Layer w25: U5.11@4145,4434.8 U5.11@4145,4436.1 ; U5.11@4145,4444.43 U5.11 ; 4480.22,4360.22 4505,4335.44 4505,4207.5 4650,4062.5 5067.5,4062.5 P2.44
PA10: P2.41 U5.12 | length 3007.6
  Top Layer w25: v1@4555,4780 4555,4710 4880,4385 5118.58,4385 5555,3948.58 5555,3705 5465,3615 5155,3615 v1(5080,3690)
  Bottom Layer w20: U5.12 4095,4488.54 4161.46,4555 4454.96,4555 4496.8,4596.83 4496.8,4700.5 v1(4565,4768.7)
  Bottom Layer w25: v1(5080,3690) P2.41
PA13: P2.42
PA14: P2.39
PA15: P2.40
PB0: P1.22
PB1: P1.21
PB2: P1.24
PB3: P2.28
PB4: C21.1 H_ENC2.4 P2.25 R8.2 | length 2605.6
  Bottom Layer w25: C21.1 2852.23,4357.23 2781.02,4286.02 2781.02,4209.1 R8.2 2777.53,3907.47 3155,3530 3960,3530 P2.25 ; C21.1@2854.45,4485 2854.45,4702.78 H_ENC2.4
PB5: C6.2 H_ENC2.2 P2.26 R6.2 | length 2164.3
  Top Layer w25: v1(3165,4200) 3167.5,4197.5 4357.5,4197.5 v1(4360,4195)
  Bottom Layer w25: C6.2@2972.88,4464.41 C6.2@2977.37,4468.91 ; H_ENC2.2 2972.43,4620.76 C6.2 2972.43,4365.64 3042.57,4295.49 3042.57,4214.82 3053.7,4203.7 3161.3,4203.7 v1(3165,4200) ; P2.26 4286.52,3956.52 4286.52,3986.52 4360,4060 v1(4360,4195)
PB6: C20.1 H_ENC1.4 P2.23 R7.2 | length 2941.9
  Top Layer w25: v1(2840,4050) 2905,4115 v1(3390,4115)
  Bottom Layer w25: v1(2840,4050) 2840,3910 3175,3575 3905,3575 P2.23 ; v1(3390,4115) 3391.21,4116.21 3391.21,4211.39 R7.2 3392.43,4287.43 3472.23,4367.23 C20.1 3476.11,4478.75 3476.11,4706.11 H_ENC1.4
PB7: C1.2 H_ENC1.2 P2.24 R5.2 | length 1181.2
  Bottom Layer w25: H_ENC1.2@3678.79,4708.79 H_ENC1.2 3680,4626.98 3602.43,4549.41 C1.2 3602.43,4375.64 3677.57,4300.49 R5.2 3688.7,4201.27 3688.7,4188.44 3822.13,4055 4075,4055 P2.24
PB8: P2.19
PB9: P2.20
PB10: H_SPI.3 P1.34 | length 2617.2
  Bottom Layer w25: H_SPI.3 4583.78,1151.22 4583.78,1076.22 4600,1060 5145,1060 5555,1470 5555,1925.36 5540.36,1940 4790,1940 P1.34
PB11: H_SPI.4 P1.35 | length 613.5
  Bottom Layer w25: H_SPI.4 4780,1265 P1.35
PB12: P1.36
PB13: P1.37
PB14: P1.38
PB15: P1.39
PC0: P1.8
PC1: P1.7
PC2: P1.10
PC3: P1.9
PC4: P1.20
PC5: P1.19
PC6: P2.47 U2.11 | length 1729.7
  Top Layer w25: v1(5115,4465) 5235,4345 5520,4345 v1(5630,4235)
  Bottom Layer w20: U2.11 4945,4494.84 4997.54,4547.39 5089.5,4547.39 5115,4521.88 v1(5115,4465)
  Bottom Layer w25: P2.47 5380,3745 5400,3725 5559.04,3725 5630,3795.96 v1(5630,4235)
PC7: P2.48 U2.12 | length 2739.4
  Top Layer w25: v1(5115,4140) 5110,4140 4900,4350 4535,4350 4470,4415 4470,4815.36 4484.64,4830 v1(5170,4830)
  Bottom Layer w20: U2.12 4895.32,4466.62 4895.32,4510.32 4985,4600 5075.08,4600 5170,4694.92 v1(5170,4830)
  Bottom Layer w25: v1(5115,4140) 5209.13,4045.87 5284.13,4045.87 P2.48
PC8: P2.45
PC9: P2.46
PC10: P2.37
PC11: P2.38
PC12: P2.35
PC13: P2.12
PC14: P2.9
PC15: P2.10
PD0: P2.36 U1.4 | length 1341.8
  Top Layer w20: v1(4546.62,4023.38) 5168.28,4023.38 5180,4035.1 5180,4180 v1(5120,4240)
  Bottom Layer w20: v1(5120,4240) 5125.74,4234.26 5125.74,4214.87 5217.42,4123.19 5217.6,4123.19 5233.98,4106.81 5260.94,4106.81 U1.4
  Bottom Layer w25: v1(4546.62,4023.38) 4555,4015 4715,4015 P2.36
PD1: P2.33 U1.1 | length 2525.4
  Top Layer w20: v1(5210,4460) 5600,4460 v1(5695,4365)
  Bottom Layer w20: P2.33 4950,3580 5460,3580 5695,3815 v1(5695,4365) ; v1(5210,4460) 5262.76,4407.24 U1.1
PD2: P2.34
PD3: P2.31
PD4: P2.32
PD5: P2.29
PD6: P2.30
PD7: P2.27
PD8: P1.40
PD9: P1.41
PD10: P1.42
PD11: P1.43
PD12: P1.44
PD13: P1.45
PD14: P1.46
PD15: P1.47
PE0: P2.17
PE1: P2.18
PE2: P2.15
PE3: P2.16
PE4: P2.13
PE5: P2.14
PE6: P2.11
PE7: P1.25
PE8: P1.26
PE9: P1.27
PE10: P1.28
PE11: P1.29
PE12: P1.30
PE13: P1.31
PE14: P1.32
PE15: P1.33
PH0: P2.7
PH1: P2.8
SONAR1_RX: Header_sonar1.2 U2.14 | length 273.4
  Bottom Layer w20: U2.14 4795,4570 Header_sonar1.2
SONAR1_TX: Header_sonar1.1 U2.13 | length 294.1
  Bottom Layer w20: U2.13 4845,4520 Header_sonar1.1
SONAR2_RX: Header_sonar2.2 U5.14 | length 441.9
  Bottom Layer w20: U5.14@3985.32,4471.62 3985.32,4553.5 4066.39,4634.57 4232.9,4634.57 Header_sonar2.2 ; U5.14@3990,4460 U5.14@3990.32,4460.32
SONAR2_TX: Header_sonar2.1 U5.13 | length 495.5
  Bottom Layer w20: U5.13@4035,4471.3 4035,4559.31 4066.36,4590.67 4289,4590.67 Header_sonar2.1
VDD: C2.1 P1.3 P1.4 P2.22 U1.3 | length 4419.1
  Top Layer w25: v1(3350,1940) 4010,1940 5695,3625 5695,3910 v1(5560,4045)
  Bottom Layer w25: P1.4 3290,1940 v1(3350,1940) ; U1.3 5350,4155 ; C2.1 5333.89,4334.01 5333.89,4311.11 5351.23,4293.78 5351.23,4155 ; 5352.68,4155 5352.68,4082.32 5390,4045 v1(5560,4045)
  Bottom Layer w35: P1.3 P1.4
pads on no net: P1.48 U1.5 U2.7 U2.8 U2.9 U2.10 U5.7 U5.8 U5.9 U5.10

## Text inside footprints (layer, text, board x,y; h text height)
P1: Top Overlay "2" at 2980,1810 h50; Top Overlay "1" at 2980,1710 h50; Top Overlay "49" at 5560,1710 h50; Top Overlay "50" at 5560,1810 h50
P2: Top Overlay "2" at 2980,3930 h50; Top Overlay "1" at 2980,3830 h50; Top Overlay "49" at 5560,3830 h50; Top Overlay "50" at 5560,3930 h50